# Altium PCB light.PcbDoc
Units mm, origin at the board's own origin, x right, y up, seen from the top; angles counter-clockwise.
Board outline 69.28 x 80 mm, 2 copper layers (Top Layer, Bottom Layer); 38 components, 23 nets, 102 pads, 12 vias.
Unrouted connection lines stored in the file: 18.
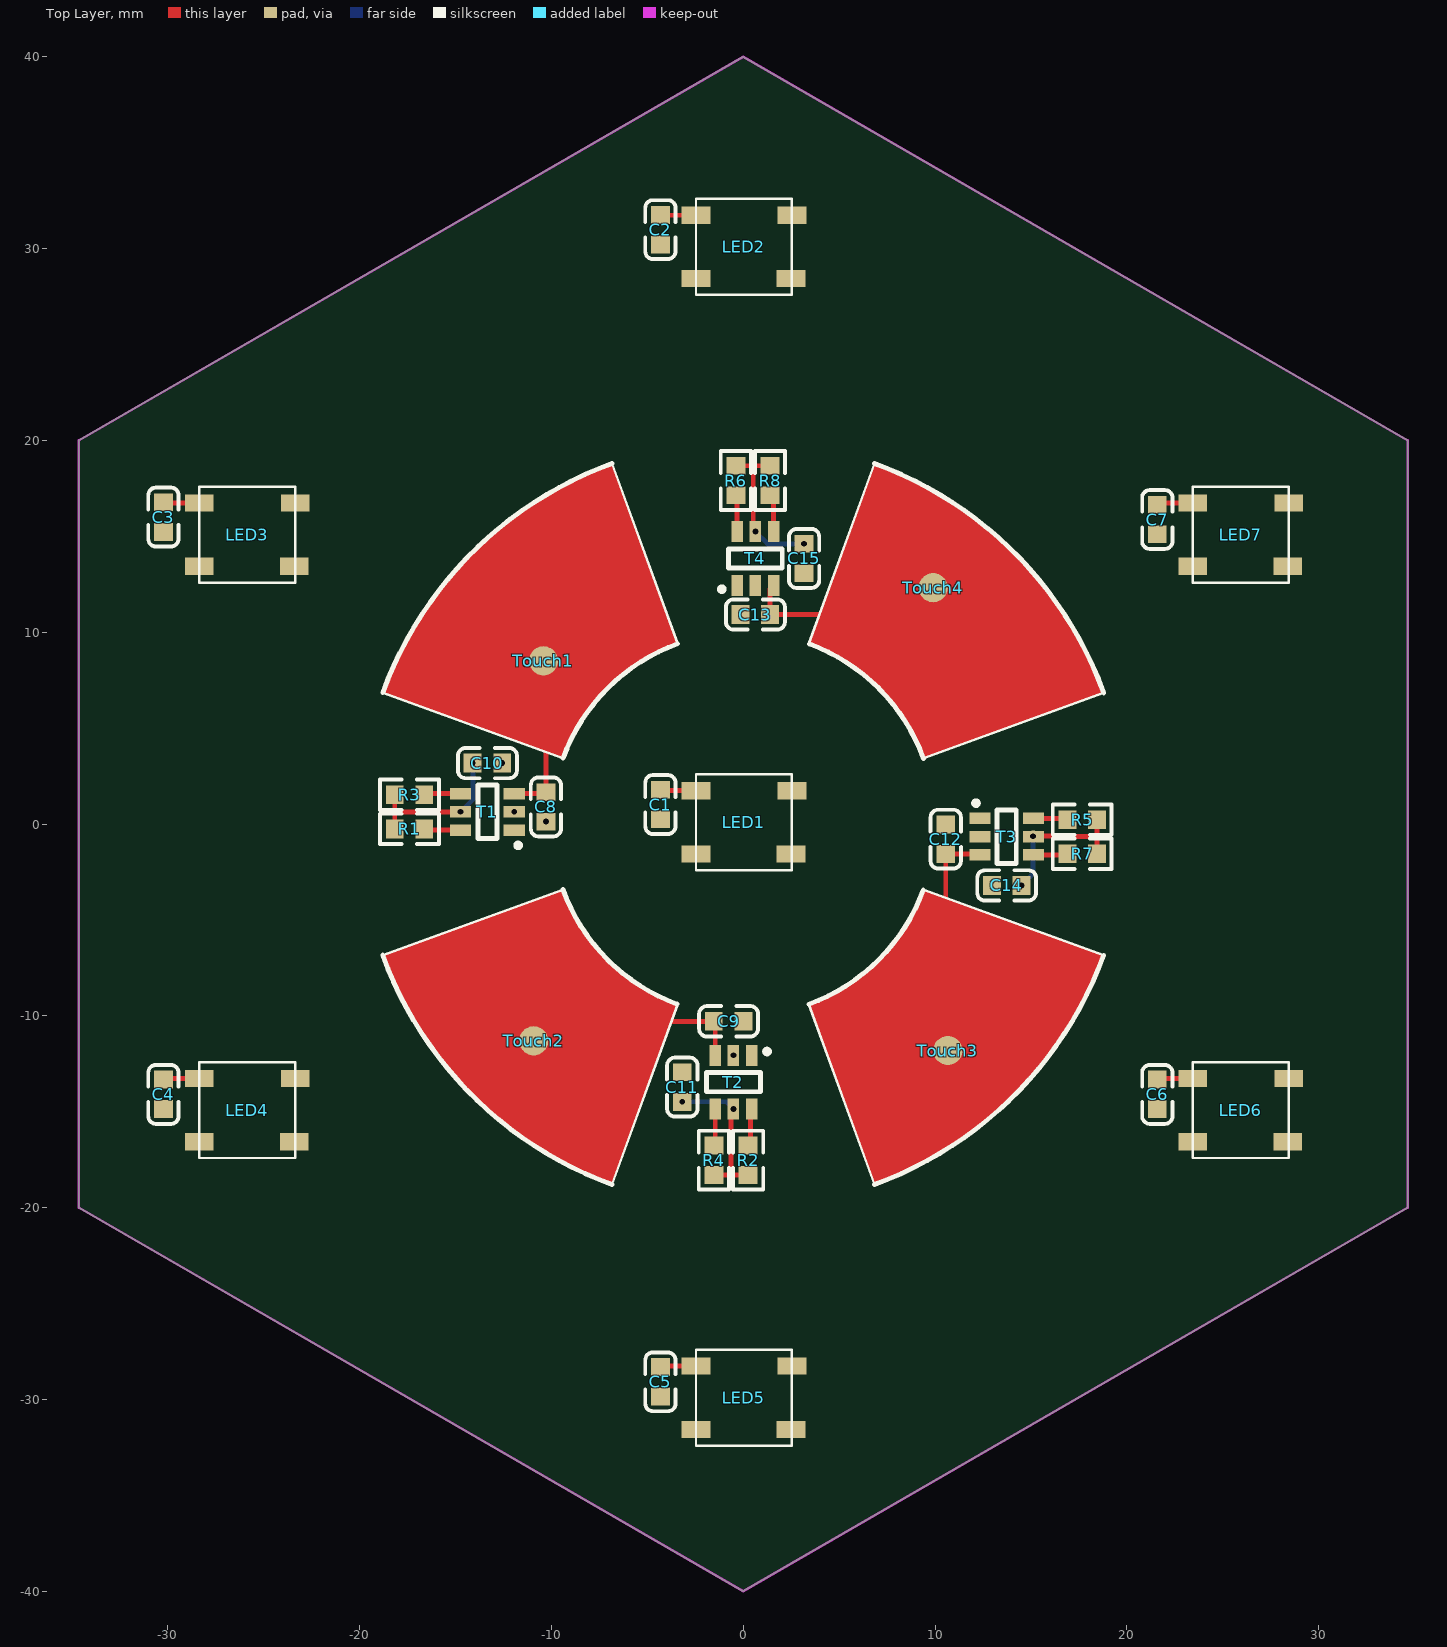
[diagram p0: Top Layer view]
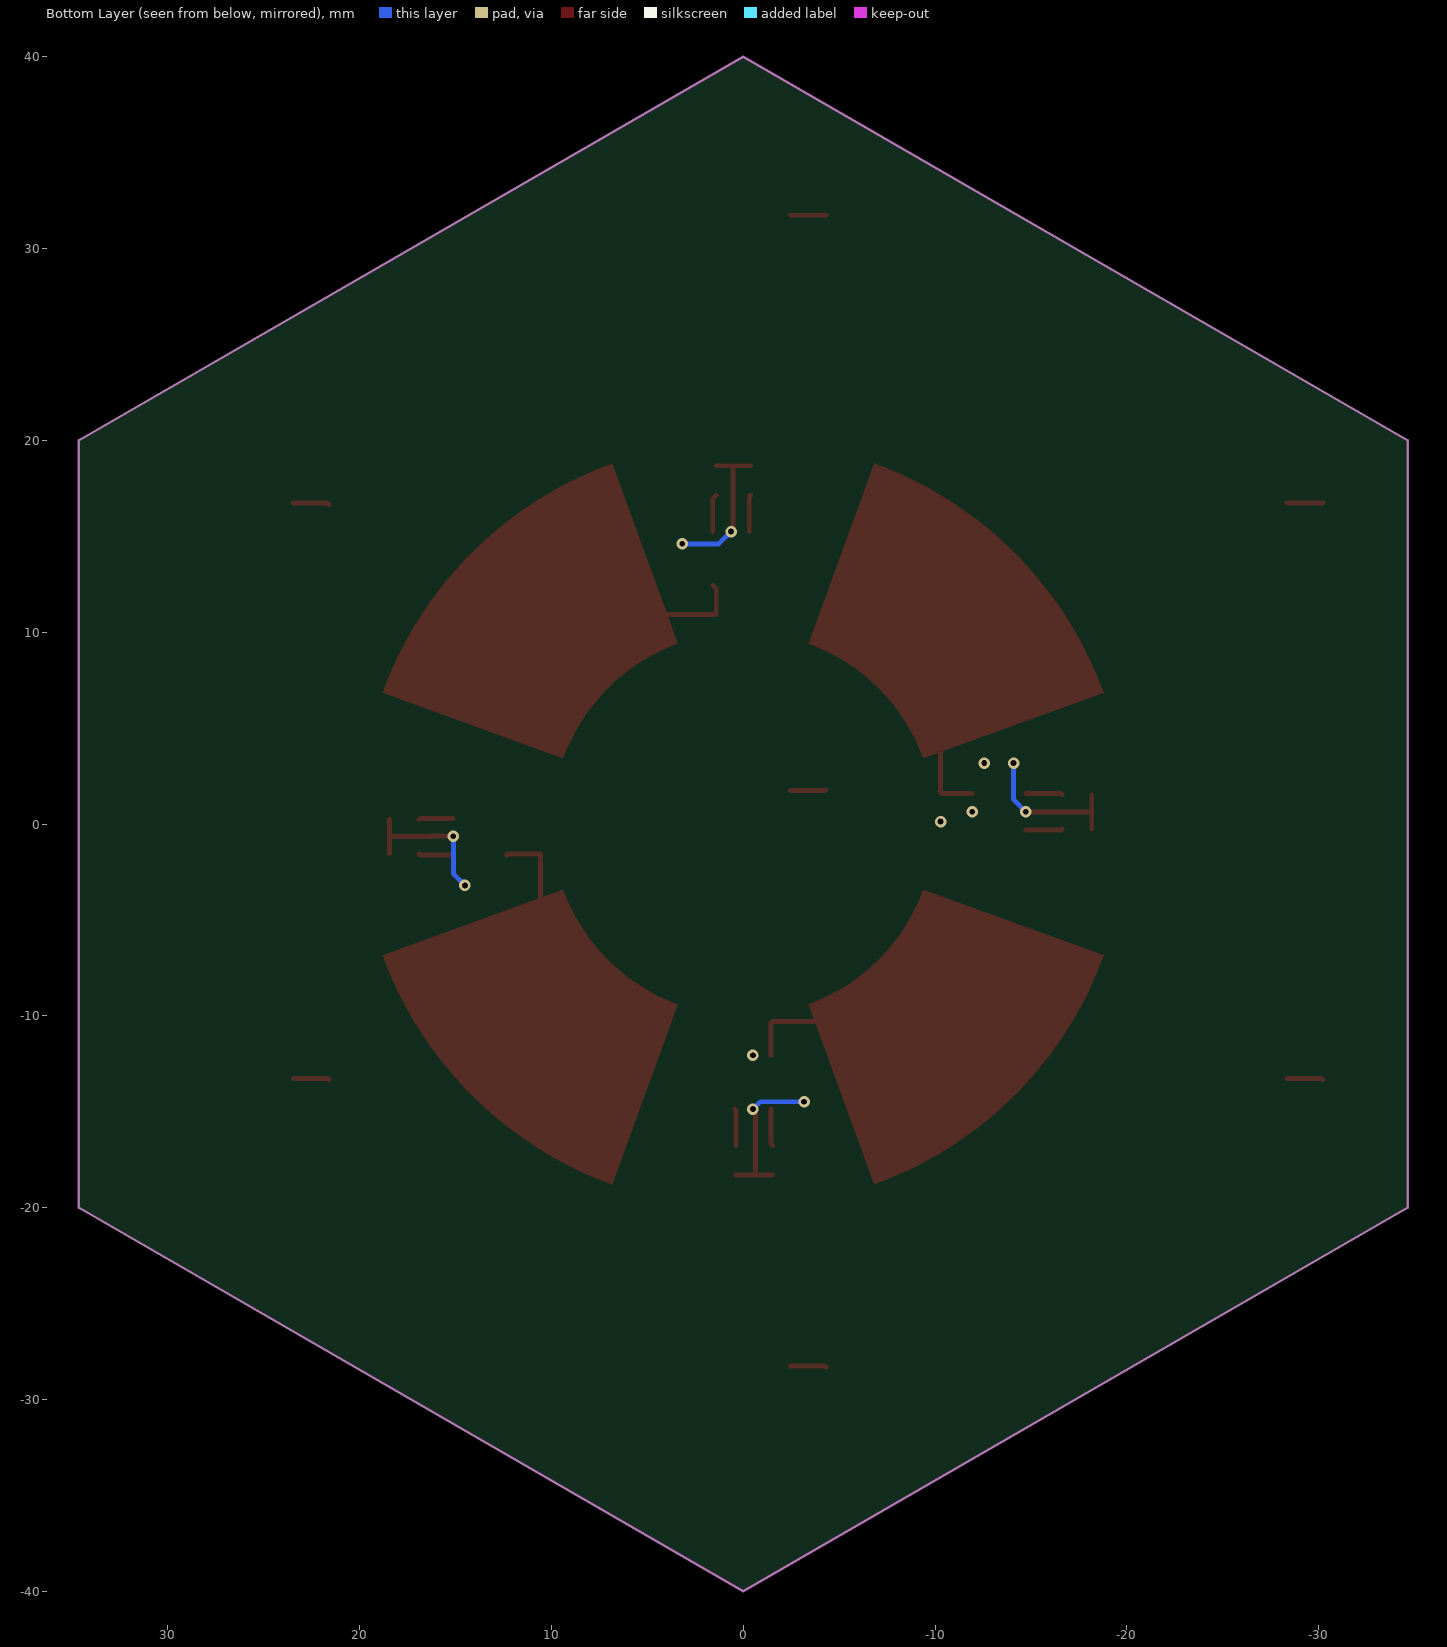
[diagram p1: Bottom Layer view, seen from below]

## Layer stack, top to bottom
Top Solder: solder mask 0.0102, Solder Resist, Dk 3.5
Top Layer: signal copper 0.0356
Dielectric 1: dielectric 0.32, FR-4, Dk 4.8
Bottom Layer: signal copper 0.0356
Bottom Solder: solder mask 0.0102, Solder Resist, Dk 3.5

## Board outline
-34.641,-20 0,-40 34.641,-20 34.641,20 0,40 -34.641,20

## Design rules (kind name [scope] priority, off if disabled: settings)
Clearance [All] p1: gap=0.254
PolygonConnect [All] p1: connectstyle=Relief reliefconductorwidth=0.254 reliefentries=4 polygonreliefangle="90 Angle" airgapwidth=0.254
RoutingVias [All] p1: holewidth=0.711 width=1.27 viastyle="Through Hole" minholewidth=0.3 minwidth=0.6 maxholewidth=0.711 maxwidth=1.27
SolderMaskExpansion [All] p1: expansion=0.102
Width [All] p1: maxlimit=0.254 minlimit=0.254 preferedwidth=0.254
30 further rules are at their usual default settings.

## Classes and differential pairs
component class led: C1 C2 C3 C4 C5 C6 C7 LED1 LED2 LED3 LED4 LED5 LED6 LED7
component class touch: C8 C9 C10 C11 C12 C13 C14 C15 R1 R2 R3 R4 R5 R6 R7 R8 T1 T2 T3 T4 Touch1 Touch2 Touch3 Touch4

## Components (designator, comment, footprint, x,y, rotation, side; value= is the part's Value field where it differs from the comment)
C1 "100nF (104) 10% 50V" 0603_C -4.318,1.016 r270 top
C2 "100nF (104) 10% 50V" 0603_C -4.318,30.988 r270 top
C3 "100nF (104) 10% 50V" 0603_C -30.226,16.002 r270 top
C4 "100nF (104) 10% 50V" 0603_C -30.226,-14.097 r270 top
C5 "100nF (104) 10% 50V" 0603_C -4.318,-29.083 r270 top
C6 "100nF (104) 10% 50V" 0603_C 21.59,-14.097 r270 top
C7 "100nF (104) 10% 50V" 0603_C 21.59,15.875 r270 top
C8 "10pF (100) 5% 50V" 0603_C -10.287,0.889 r90 top
C9 "10pF (100) 5% 50V" 0603_C -0.762,-10.287 r180 top
C10 "100nF (104) 10% 50V" 0603_C -13.335,3.175 r180 top
C11 "100nF (104) 10% 50V" 0603_C -3.175,-13.716 r270 top
C12 "10pF (100) 5% 50V" 0603_C 10.56,-0.79 r270 top
C13 "10pF (100) 5% 50V" 0603_C 0.635,10.922 r0 top
C14 "100nF (104) 10% 50V" 0603_C 13.735,-3.203 r0 top
C15 "100nF (104) 10% 50V" 0603_C 3.175,13.843 r90 top
LED1 "WS2812B" WS2812 0,0 r0 top
LED2 "WS2812B" WS2812 0,30 r0 top
LED3 "WS2812B" WS2812 -25.9,15 r0 top
LED4 "WS2812B" WS2812 -25.9,-15 r0 top
LED5 "WS2812B" WS2812 0,-30 r0 top
LED6 "WS2812B" WS2812 25.9,-15 r0 top
LED7 "WS2812B" WS2812 25.9,15 r0 top
R1 "NC" 0603_R -17.399,-0.254 r180 top
R2 "NC" 0603_R 0.254,-17.526 r270 top
R3 "NC" 0603_R -17.399,1.524 r180 top
R4 "NC" 0603_R -1.524,-17.526 r270 top
R5 "NC" 0603_R 17.672,0.226 r0 top
R6 "NC" 0603_R -0.381,17.907 r90 top
R7 "NC" 0603_R 17.672,-1.552 r0 top
R8 "NC" 0603_R 1.397,17.907 r90 top
T1 "TTP223" SOT-23-6 -13.335,0.635 r0 top
T2 "TTP223" SOT-23-6 -0.508,-13.462 r90 top
T3 "TTP223" SOT-23-6 13.735,-0.663 r180 top
T4 "TTP223" SOT-23-6 0.635,13.843 r270 top
Touch1 "TP" TP -10.414,8.509 r90 top
Touch2 "TP" TP -10.922,-11.303 r270 top
Touch3 "TP" TP 10.668,-11.811 r0 top
Touch4 "TP" TP 9.906,12.319 r90 top

## Footprints (in the part's own frame and the unit in brackets; to place one, negate y for a bottom-side part, rotate by r counter-clockwise, add the part's x,y. Pads: shape width x height; smd on the part's side, far side on the other; paste and mask are expansions set on the pad)
0603_C [mm]
  rect 0.93x0.98 smd: 1(-0.77,0) 2(0.77,0)
  silkscreen extent -1.53,-0.79 1.54,0.79, body extent -0.8,-0.4 0.8,0.4, height 0.3
0603_R [mm]
  rect 0.93x0.98 smd: 1(-0.77,0) 2(0.77,0)
  silkscreen extent -1.53,-0.79 1.54,0.79, body extent -0.85,-0.4 0.85,0.4, height 0.56
SOT-23-6 [mm]
  rect 1.1x0.6 smd: 1(1.4,-0.95) 2(1.4,0) 3(1.4,0.95) 4(-1.4,0.95) 5(-1.4,0) 6(-1.4,-0.95)
  silkscreen extent -0.5,-1.87 1.73,1.4
TP [mil]
  round 60 smd mask+11.81: 1(0,0)
WS2812 [mm]
  rect 1.5x0.9 smd: 1(-2.46,1.737) 2(-2.46,-1.563) 3(2.493,-1.563) 4(2.54,1.737)
  silkscreen extent -2.46,-2.41 2.54,2.59

## Part data
C1 C2 C3 C4 C5 C6 C7 C10 C11 C14 C15: library part "0603 100nF (104) 10% 50V", "贴片电容"
C8 C9 C12 C13: library part "0603 10pF (100) 5% 50V", "贴片电容"
R1 R2 R3 R4 R5 R6 R7 R8: library part "0603 10KΩ (1002) 1%", "贴片电阻"

## Via types
v1: diameter 0.6, hole 0.3, Top Layer to Bottom Layer, 12 vias

## Nets (pads, with @x,y where several pads share a name; then routed paths per layer and width w, separated by ;. In a path a pad name is that pad's centre, name@x,y a point inside that pad or via, vN(x,y) a via of type N, cw(c..) or ccw(c..) an arc to the next point about the centre after c; other vN are vias at no path point)
DIN: LED1.4
GND: C1.2 C2.2 C3.2 C4.2 C5.2 C6.2 C7.2 C8.1 C9.1 C10.1 C11.1 C12.1 C13.1 C14.1 C15.1 LED1.3 LED2.3 LED3.3 LED4.3 LED5.3 LED6.3 LED7.3 T1.2 T2.2 T3.2 T4.2 | length 0
  Top Layer w0.254: v1(-11.938,0.635) T1.2 ; C8.1 v1(-10.287,0.127)
  other v1: -0.508,-12.062 -12.565,3.175
NetC8_2: C8.2 T1.3 Touch1.1 | length 4
  Top Layer w0.254: T1.3 -10.361,1.585 C8.2 -10.287,3.937
NetC9_2: C9.2 T2.3 Touch2.1 | length 6.2
  Top Layer w0.254: -5.842,-10.16 -5.715,-10.287 C9.2 -1.458,-10.361 T2.3
NetC12_2: C12.2 T3.3 Touch3.1 | length 5.6
  Top Layer w0.254: 10.414,-5.334 10.56,-5.188 C12.2 12.282,-1.56 T3.3
NetC13_2: C13.2 T4.3 Touch4.1 | length 5.6
  Top Layer w0.254: T4.3 1.405,12.263 C13.2 5.08,10.922 5.334,10.668
NetLED1_2: LED1.2 LED2.4
NetLED2_2: LED2.2 LED3.4
NetLED3_2: LED3.2 LED4.4
NetLED4_2: LED4.2 LED5.4
NetLED5_2: LED5.2 LED6.4
NetLED6_2: LED6.2 LED7.4
NetR1_1: R1.1 T1.6 | length 1.9
  Top Layer w0.254: R1.1 -16.568,-0.315 T1.6
NetR2_1: R2.1 T2.6 | length 1.9
  Top Layer w0.254: R2.1@0.381,-16.756 0.381,-14.923 T2.6
NetR3_1: R3.1 T1.4 | length 1.9
  Top Layer w0.254: R3.1 -16.568,1.585 T1.4
NetR4_1: R4.1 T2.4 | length 1.9
  Top Layer w0.254: R4.1 -1.458,-16.69 T2.4
NetR5_1: R5.1 T3.6 | length 1.8
  Top Layer w0.254: T3.6 16.841,0.287 R5.1
NetR6_1: R6.1 T4.6 | length 1.9
  Top Layer w0.254: R6.1 -0.315,17.071 T4.6
NetR7_1: R7.1 T3.4 | length 1.8
  Top Layer w0.254: T3.4 16.841,-1.613 R7.1
NetR8_1: R8.1 T4.4 | length 2
  Top Layer w0.254: R8.1 1.585,16.949 T4.4
OUT: T1.1 T2.1 T3.1 T4.1
VCC: C10.2 C11.2 C14.2 C15.2 R1.2 R2.2 R3.2 R4.2 R5.2 R6.2 R7.2 R8.2 T1.5 T2.5 T3.5 T4.5 | length 32.3
  Top Layer w0.254: R1.2 R3.2 ; -18.161,0.635 v1(-14.735,0.635) ; C11.2 v1(-3.175,-14.478) ; R4.2 -0.635,-18.296 ; v1(-0.508,-14.859) -0.635,-14.986 -0.635,-18.296 ; R6.2 0.508,18.677 ; R2.2@0.381,-18.296 R2.2 -0.635,-18.296 ; v1(0.635,15.243) 0.526,15.243 0.526,18.659 0.508,18.677 ; R8.2 0.508,18.677 ; v1(3.175,14.605) C15.2 ; T3.5 15.163,-0.635 16.259,-0.635 16.269,-0.645 18.432,-0.645 18.442,-0.635 ; R7.2 18.442,-0.635 ; R5.2 18.442,-0.635
  Bottom Layer w0.254: v1(-14.735,0.635) -14.097,1.273 v1(-14.097,3.175) ; v1(-3.175,-14.478) -0.889,-14.478 v1(-0.508,-14.859) ; v1(0.635,15.243) 1.273,14.605 v1(3.175,14.605) ; v1(14.505,-3.203) 15.113,-2.595 v1(15.113,-0.635)
VDD: C1.1 C2.1 C3.1 C4.1 C5.1 C6.1 C7.1 LED1.1 LED2.1 LED3.1 LED4.1 LED5.1 LED6.1 LED7.1 | length 13.2
  Top Layer w0.254: C4.1 -30.162,-13.263 LED4.1 ; C3.1 -30.191,16.737 LED3.1 ; C5.1 -4.268,-28.263 LED5.1 ; C1.1 -4.269,1.737 LED1.1 ; C2.1 -4.297,31.737 LED2.1 ; C6.1 21.654,-13.263 LED6.1 ; C7.1 21.682,16.737 LED7.1
pads on no net: LED7.2

## Keep-outs
Keep-Out Layer:
  the board outline again, w0.127

## Other copper
Top Layer:
  region net NetC8_2: -18.794,6.84 -9.397,3.42 -9.388,3.445 cw(c0,0) -3.42,9.397 -6.84,18.794 -6.835,18.796 ccw(c0,0)
  region net NetC9_2: -6.84,-18.794 -3.42,-9.397 -3.445,-9.388 cw(c0,0) -9.397,-3.42 -18.794,-6.84 -18.796,-6.835 ccw(c0,0)
  region net NetC12_2: 18.794,-6.84 9.397,-3.42 9.388,-3.445 cw(c0,0) 3.42,-9.397 6.84,-18.794 6.835,-18.796 ccw(c0,0)
  region net NetC13_2: 6.84,18.794 3.42,9.397 3.445,9.388 cw(c0,0) 9.397,3.42 18.794,6.84 18.796,6.835 ccw(c0,0)

## Silkscreen, mask and mechanical layers (free items; w line width, h text height)
Top Overlay:
  lines w0.127: -18.794,-6.84 -9.397,-3.42 ; -18.794,6.84 -9.397,3.42 ; -6.84,-18.794 -3.42,-9.397 ; -6.84,18.794 -3.42,9.397 ; 3.42,-9.397 6.84,-18.794 ; 3.42,9.397 6.84,18.794 ; 9.397,-3.42 18.794,-6.84 ; 9.397,3.42 18.794,6.84
  lines w0.254: -18.796,-6.835 ccw(c0,0) -6.84,-18.794 ; -18.794,6.84 cw(c0,0) -6.835,18.796 ; -9.397,-3.42 ccw(c0,0) -3.445,-9.388 ; -9.388,3.445 cw(c0,0) -3.42,9.397 ; 3.42,-9.397 ccw(c0,0) 9.388,-3.445 ; 3.445,9.388 cw(c0,0) 9.397,3.42 ; 6.835,-18.796 ccw(c0,0) 18.794,-6.84 ; 6.84,18.794 cw(c0,0) 18.796,6.835